# Altium PCB Regulator.PcbDoc
Units mil, origin at the board's own origin, x right, y up, seen from the top; angles counter-clockwise.
Board outline 2700 x 2100 mil, 2 copper layers (Top Layer, Bottom Layer), stack 62.8 mil thick; 15 components, 31 nets, 62 pads, 18 vias.
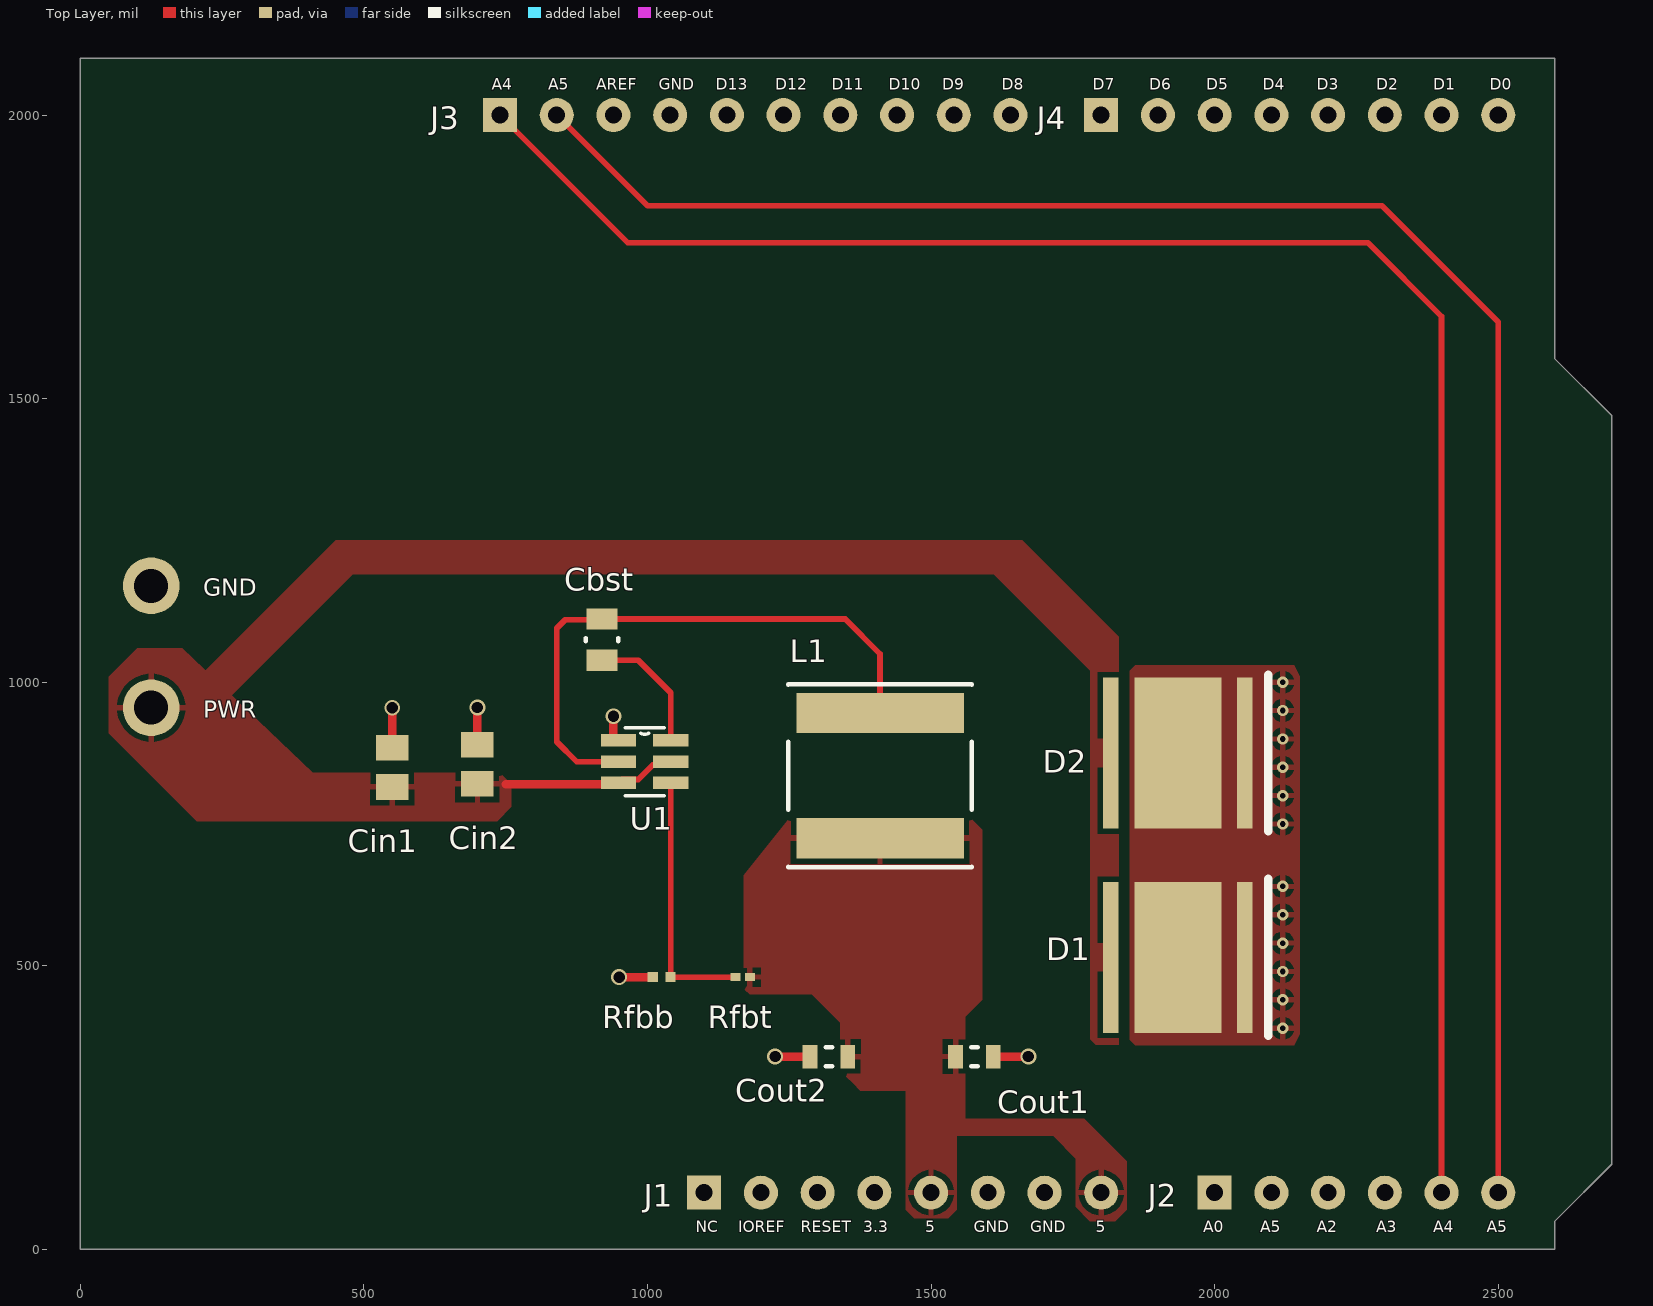
[diagram p0: Top Layer view]
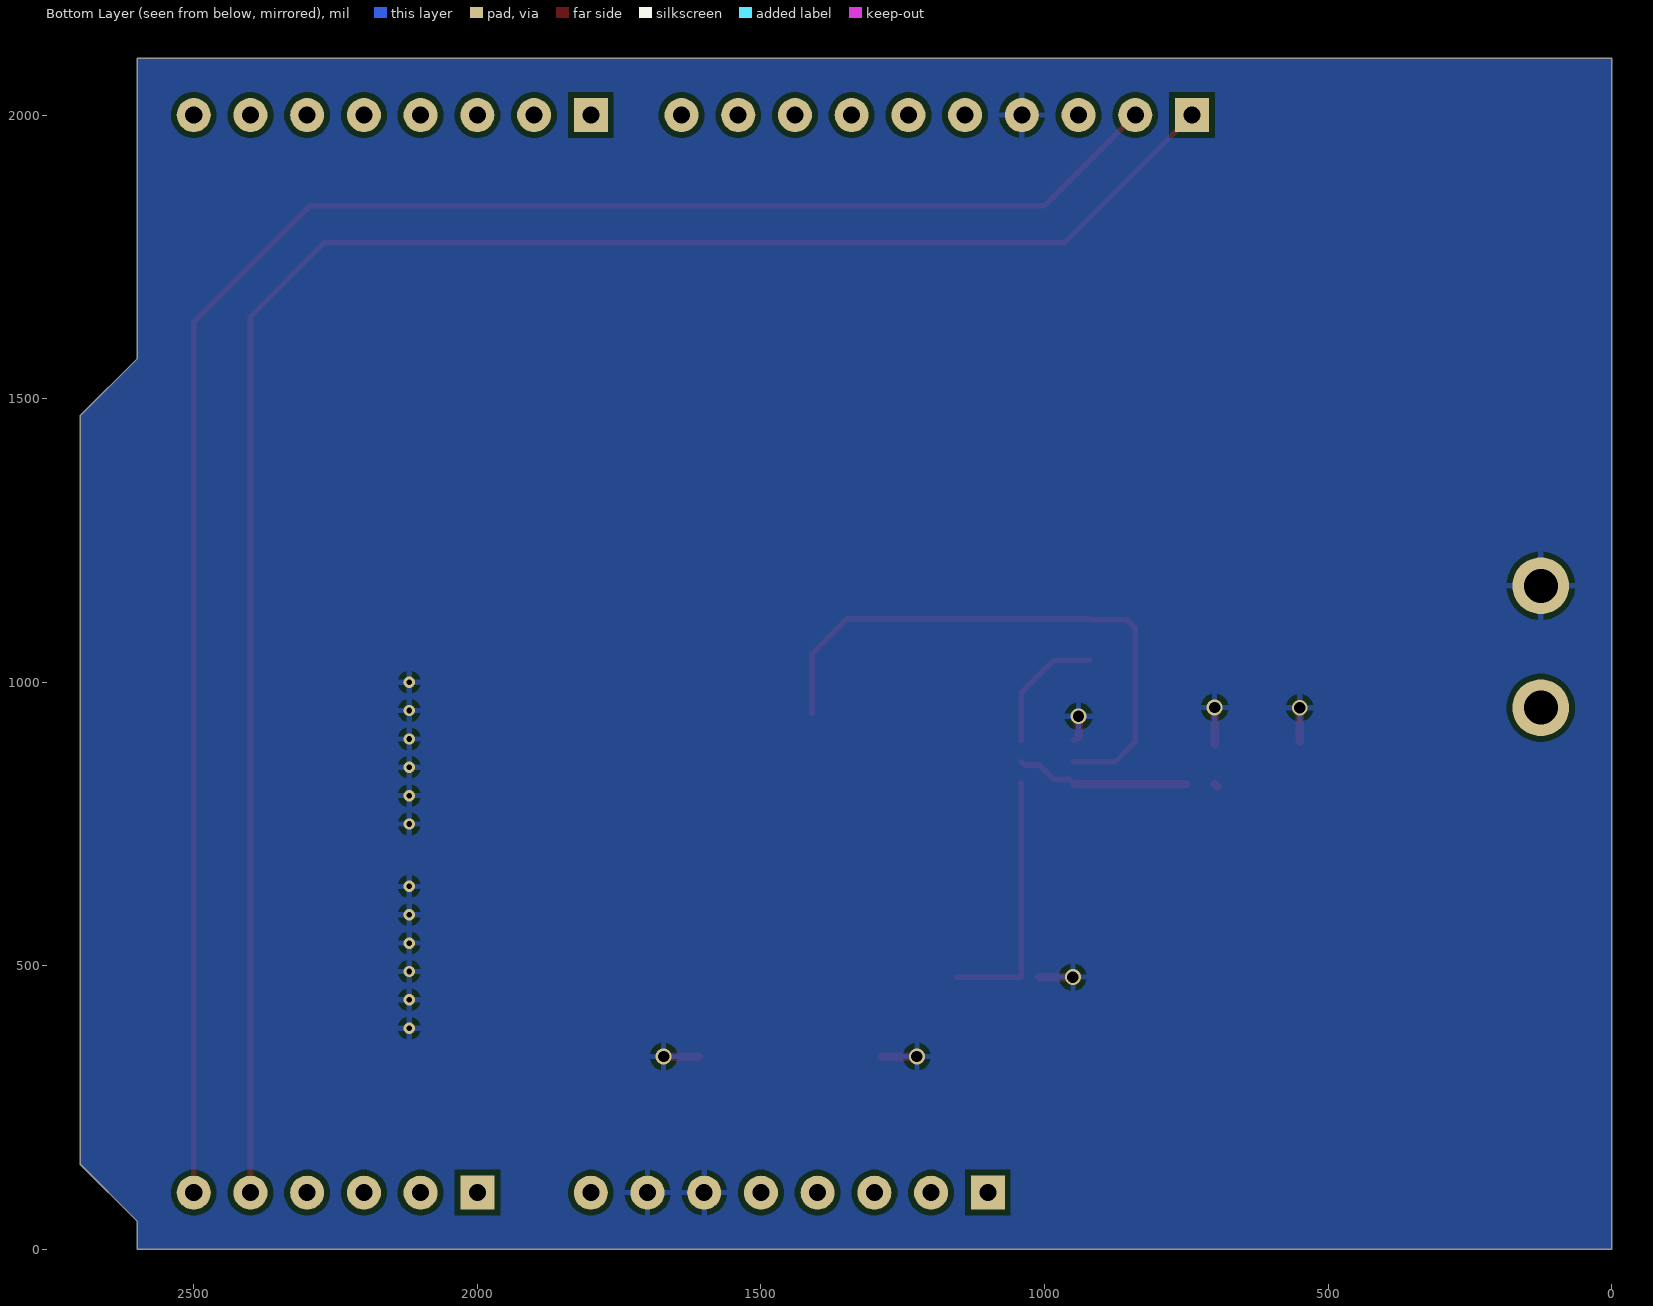
[diagram p1: Bottom Layer view, seen from below]

## Layer stack, top to bottom
Top Solder: solder mask 0.4, Solder Resist, Dk 3.5
Top Layer: signal copper 1.4
Dielectric 1: dielectric 60, FR-4, Dk 4.8
Bottom Layer: signal copper 1.4
Bottom Solder: solder mask 0.4, Solder Resist, Dk 3.5

## Board outline
0,0 0,2100 2600,2100 2600,1570 2700,1470 2700,150 2600,50 2600,0

## Design rules (kind name [scope] priority, off if disabled: settings)
Clearance [All] p1: gap=10 ignorepadtopadclearanceinfootprint=TRUE except(0: Arc-Hole Track-Hole SMDPad-Hole THPad-Hole Via-Hole Fill-Hole Poly-Hole Region-Hole Text-Hole)
MinimumSolderMaskSliver [All] p1: minsoldermaskwidth=5
PolygonConnect [All] p1: connectstyle=Relief reliefconductorwidth=10 reliefentries=4 polygonreliefangle="90 Angle" airgapwidth=10
RoutingVias [All] p1: holewidth=10 width=18 viastyle="Through Hole" minholewidth=6 minwidth=14 maxholewidth=28 maxwidth=50
SilkToSolderMaskClearance [IsPad] p1: minsilkscreentomaskgap=5 clearancetoexposedcopper=TRUE
SolderMaskExpansion [All] p1: expansion=0 istentingtop=FALSE
Width [All] p1: maxlimit=30 minlimit=5 preferedwidth=10
28 further rules are at their usual default settings.

## Components (designator, comment, footprint, x,y, rotation, side; value= is the part's Value field where it differs from the comment)
Cbst "CC0805KRX7R8BB104" FP-CC0805-0_85-MFG 920,1075 r90 top value="100 nF"
Cin1 "C2012X5R1V106K085AC" CAPC2012X100N 550,850 r90 top
Cin2 "C2012X5R1V106K085AC" CAPC2012X100N 700,855.35 r90 top
Cout1 "C1608X5R1A226M080AC" CAPC1608X100X20ML10 1576.54,340 r180 top
Cout2 "C1608X5R1A226M080AC" CAPC1608X100X20ML10 1320,340 r0 top
D1 "MKRAWT-00-0000-0D0HG235H" CREE-MK-R-2_V 1935,515 r0 top
D2 "MKRAWT-00-0000-0D0HG235H" CREE-MK-R-2_V 1935,875 r0 top
J1 "8-Pin-Header" 8-Pin-Header-Footprint-1 1100,100 r0 top
J2 "6-Pin-Header" 6-PINHEADER-Footprint-1 2000,100 r0 top
J3 "10-Pin-Header" 10-Pin-Header-Footprint-1 740,2000 r0 top
J4 "8-Pin-Header" 8-Pin-Header-Footprint-1 1800,2000 r0 top
L1 "NRS8030T3R3MJGJ" FP-NRS8030-MFG 1410,835.24 r270 top
Rfbb "ERJ2RKF1002X" RESC1005X40X25LL05T05 1025,480 r0 top
Rfbt "CRCW020156K2FNED" RESC0603X28X15NL05T05 1167.8,480 r0 top
U1 "TPS562200DDCR" DDC0006A 995,860 r0 top

## Footprints (in the part's own frame and the unit in brackets; to place one, negate y for a bottom-side part, rotate by r counter-clockwise, add the part's x,y. Pads: shape width x height; smd on the part's side, far side on the other; paste and mask are expansions set on the pad)
6-PINHEADER-Footprint-1 [mil]
  rect 60x60 hole 30: 1(0,0)
  round 60 hole 30: 2(100,0) 3(200,0) 4(300,0) 5(400,0) 6(500,0)
8-Pin-Header-Footprint-1 [mil]
  rect 60x60 hole 30: 1(0,0)
  round 60 hole 30: 2(100,0) 3(200,0) 4(300,0) 5(400,0) 6(500,0) 7(600,0) 8(700,0)
10-Pin-Header-Footprint-1 [mil]
  rect 60x60 hole 30: 1(0,0)
  round 60 hole 30: 2(100,0) 3(200,0) 4(300,0) 5(400,0) 6(500,0) 7(600,0) 8(700,0) 9(800,0) 10(900,0)
CAPC1608X100X20ML10 [mm] "Chip Capacitor, 2-Leads, Body 1.70x0.90mm, IPC Low Density"
  rect 0.65x1.05 smd: 1(-0.85,0) 2(0.85,0)
  silkscreen extent -0.15,-0.43 0.15,0.43, body extent -0.85,-0.45 0.85,0.45, height 1
CAPC2012X100N [mm]
  rect 1.15x1.47 smd: 1(-0.88,0) 2(0.88,0)
  body extent -1,-0.63 1,0.63, height 1
CREE-MK-R-2_V [mm] "SMD, 2-Leads, Body 7x7mm, Thermal Pad 3.9x6.76mm"
  rect 0.7x6.76 smd: 1(-3,0) 2(3,0)
  rect 3.9x6.76 smd: 3(0,0)
  silkscreen extent 4.05,-3.5 4.05,3.5, body extent -3.5,-3.5 3.5,3.5, height 4.1
DDC0006A [mil]
  rect 62x22 smd paste-4 mask+2: 1(-46,37.4) 2(-46,0) 3(-46,-37.4) 4(46,-37.4) 5(46,0) 6(46,37.4)
  silkscreen extent -34,-60 34,60
FP-CC0805-0_85-MFG [mm]
  rect 0.95x1.4 smd paste+0 mask+0: 1(-0.925,0) 2(0.925,0)
  silkscreen extent -0.08,-0.72 0.08,0.72, body extent -1.6,-1.05 1.6,1.05, height 0.25
FP-NRS8030-MFG [mm]
  rect 1.8x7.5 smd paste+0 mask+0: 1(-2.8,0) 2(2.8,0)
  silkscreen extent -4.1,-4.1 4.1,4.1, body extent -4.2,-4.2 4.2,4.2, height 0.25
RESC0603X28X15NL05T05 [mm] "Chip Resistor, 2-Leads, Body 0.60x0.30mm, IPC Medium Density"
  rect 0.45x0.35 smd: 1(-0.325,0) 2(0.325,0)
  body extent -0.33,-0.17 0.33,0.18, height 0.28
RESC1005X40X25LL05T05 [mm] "Chip Resistor, 2-Leads, Body 1.05x0.55mm, IPC High Density"
  rect 0.45x0.45 smd: 1(-0.4,0) 2(0.4,0)
  body extent -0.53,-0.28 0.53,0.28, height 0.4

## Part data
Cbst: library part CMP-1036-04410-2, "CAP CER 0.1UF 25V X7R 0805", Capacitance="100 nF", Manufacturer=Yageo, Package=CC0805-0.85, Temperature="-30°C to +85°C", Temperature Characteristic=X7R, Temperature Range High=+85°C, Temperature Range Low=-30°C, Tolerance=0.1, Voltage Rating="25 V", Automotive=No, Category=Cap, ComponentLink2Description=Datasheet, ComponentLink2URL=http://www.yageo.com/documents/recent/UPY-GPHC_Y5V_6.3V-to-50V_8.pdf, Device Class L1="Passive Components", Device Class L2=Capacitors, Device Class L3="Ceramic Capacitors", Digikey Description="CAP CER 0.1UF 25V X7R 0805", Footprint Url=http://www.yageo.com/exep/pages/download/literatures/UPY-C_GEN_24.pdf, Height=0.95mm, Ipc Land Pattern Name=CAPC200125X85, Lead Free=Yes, Manufacturer Part Number=CC0805KRX7R8BB104, Material=Ceramic, Mouser Description="Multilayer Ceramic Capacitors MLCC - SMD/SMT 100nF 25V X7R 10%", Octopart=https://octopart.com/cc0805krx7r8bb104-yageo-39467766, RoHS=TRUE
Cin1 Cin2: "10ÂµF Â±10% 35V Ceramic Capacitor X5R 0805 (2012 Metric)", Package="2012 TDK", Check_prices=https://www.snapeda.com/parts/C2012X5R1V106K085AC/TDK-Lambda+Americas+Inc/view-part/?ref=eda, MF=TDK, MP=C2012X5R1V106K085AC, Purchase-URL=https://pricing.snapeda.com/search/part/C2012X5R1V106K085AC/?ref=eda, SnapEDA_Link=https://www.snapeda.com/parts/C2012X5R1V106K085AC/TDK-Lambda+Americas+Inc/view-part/?ref=snap
Cout1 Cout2: library part CMP-2000-05441-1, "Chip Capacitor, 22 uF, +/- 20%, 10 V, -55 to 85 degC, 0603 (1608 Metric), RoHS, Tape and Reel", Capacitance=22µF, Manufacturer=TDK, Operating Temperature=-55degC~85degC, Package / Case=0603(1608Metric), Package Description="2-Pin Surface Mount Device, Body 1.6 x 0.8 mm", Package Reference=603, PCN Part Number=MLCCPartNumberChange30/Nov/2012, Ratings=-, Standard Package=1, Temperature Coefficient=X5R, Tolerance=±20%, Voltage - Rated=10V, Applications=GeneralPurpose, Category=Capacitors, Datasheet URL=http://download.siliconexpert.com/pdfs/2015/4/21/15/54/45/779/tdk_/manual/37024850441143360mlcc_commercial_general_en.pdf, Datasheet Version=Mar-15, Design Resources=20WNon-IsolatedBuckLEDDriverUsingPLLNK460KG, Family=CeramicCapacitors, Features=-, Height - Seated (Max)=-, Kits=445-9014-KIT-ND-KITMLCC100PF-22UF060310-50V, Lead Spacing=-, Lead Style=-, Manufacturer URL=http://www.tdk.com/, Mounting Type=SurfaceMount,MLCC, Online Catalog=CSeries,GeneralPurpose, Other Names=445-9077-1, Packaging=CutTape(CT), Product Training Modules=CSeriesGeneralApplicationsSEAT,CCV,andTVCLDesignToolsGuidetoReplacinganElectrolyticCapacitorwithanMLCC, RoHS Information=RoHSCertificate-MLCC, Series=C, Size / Dimension="0.063\"Lx0.031\"W(1.60mmx0.80mm)", Thickness (Max)="0.035\"(0.90mm)"
D1 D2: library part CMP-2100-00977-1, "LED, White, 12 V, 2-Pin SMD, RoHS, Tape and Reel"
J1 J4: library part CMP-002-00072-1, "simple 8 pin header", Pins=8
J2: library part CMP-002-00071-1, "Simple 6 pin header", Pins=6
J3: library part CMP-002-00073-1, "Simple 10 pin header", Pins=10
L1: library part CMP-14484-000405-1, "Inductor Power Shielded Wirewound 3.3uH 20% 100KHz Ferrite 4.2A 24.7mΩ DCR T/R", Case/Package=Nonstandard, Current Rating=4.3A, DC Resistance (DCR)=19mR, Inductance=3.3uH, Inductance Tolerance=20%, Max DC Current=4.2A, Max Operating Temperature=125°C, Min Operating Temperature=-25°C, Package Quantity=1000, Resistor Type=Wirewound, Self Resonant Frequency=50MHz, Test Frequency=100kHz, Core Material=Ferrite, Depth=8.2mm, Halogen Free="Halogen Free", Height=3mm, Height - Seated (Max)=0.118inch, Lead Free="Lead Free", Lead Pitch=5.6mm, Length=8mm, Mount="Surface Mount", Number of Pins=2, Packaging="Tape and Reel", Radiation Hardening=No, REACH SVHC="No SVHC", RMS Current (Irms)=4.3A, RoHS Compliant=Yes, Saturation Current=4.2A, Series=NRS, Shielding=Shielded, Termination=SMD/SMT, Tolerance=20%, Width=0.315inch
Rfbb: library part CMP-2000-07588-1, "Chip Resistor, 10 KOhm, +/- 1%, 0.1 W, -55 to 155 degC, 0402 (1005 Metric), RoHS, Tape and Reel", Case Code (Imperial)=0402, Case Code (Metric)=1005, Manufacturer=Panasonic, Max Operating Temperature=155degC, Max Power Dissipation=100mW, Min Operating Temperature=-55degC, Package Description="2-Pin Surface Mount Device, Body 1 x 0.5 mm", Package Quantity=1, Package Reference=402, Resistance=10KOhm, Temperature Coefficient=100ppm\/degreesC, Tolerance=1%, Voltage Rating=50V, Case\/Package=0402, Composition=ThickFilm, Contact Plating=Tin, Datasheet URL=https://industrial.panasonic.com/cdbs/www-data/pdf/RDA0000/AOA0000C304.pdf, Datasheet Version=02/2017, Depth=0.5mm, Height=0.35mm, Lead Free=LeadFree, Length=1mm, Manufacturer URL=http://www.panasonic.com/, Military Standard=Not, Mount=SurfaceMount, Mounting Technology=SurfaceMount, Number of Pins=2, Number of Terminations=2, Packaging=TapeandReel, Power Rating=100mW, Radiation Hardening=No, REACH SVHC=NoSVHC, RoHSCompliant=True, Termination=SMD/SMT, Voltage Rating (DC)=50V, Width=0.02inch
Rfbt: library part CMP-2004-00723-1, Manufacturer="Vishay Dale", Part Number=CRCW020156K2FNED
U1: "No Description Available", Alternate_Manufacturer=None, CurrentDate="Not shown in title block", Manufacturer="Texas Instruments", PartNumber=TPS562200DDC, Address1="Not shown in title block", Address2="Not shown in title block", Address3="Not shown in title block", Address4="Not shown in title block", ApprovedBy="Not shown in title block", Author="Not shown in title block", CheckedBy="Not shown in title block", CompanyName="Not shown in title block", ComponentLink1Description="Datasheet Link", ComponentLink1URL=https://sps06.itg.ti.com/sites/KMS/crossdivteams/altium/docs/ComponentDatasheets/TPS562200_DS_v08_13_0909.docx, CompType=IC, Copyright="Copyright (C) 2023 Ultra Librarian. All rights reserved.", CurrentTime="Not shown in title block", Date="Not shown in title block", DocumentFullPathAndName="Not shown in title block", DocumentName="Not shown in title block", DocumentNumber=1, Engineer="Not shown in title block", ImagePath="Not shown in title block", LatestRevisionDate=2014-02-20, Manufacturer_Part_Number=TPS562200DDCR, Mfr_Name="Texas Instruments", ModifiedDate="Not shown in title block", MountType=SMT, Organization="Not shown in title block", PackageReference=DDC0006A, Publisher="Texas Instruments", RefDes=RefDes, Revision="Use project parameter SCH_Rev", RoHS=Y, SheetNumber=1, SheetTotal=1, SymbolCreator=a0411947, SymbolVersion=2013-09-26, Time="Not shown in title block", Type=DEV, U/M=EA

## Free pads (board coordinates)
  round 100 hole 60: 19(125,955) 19(125,1170)

## Via types
v1: diameter 20, hole 10, Top Layer to Bottom Layer, 12 vias
v2: diameter 28, hole 20, Top Layer to Bottom Layer, 6 vias

## Nets (pads, with @x,y where several pads share a name; then routed paths per layer and width w, separated by ;. In a path a pad name is that pad's centre, name@x,y a point inside that pad or via, vN(x,y) a via of type N, cw(c..) or ccw(c..) an arc to the next point about the centre after c; other vN are vias at no path point)
3.3V: J1.4
+5: Cout1.2 Cout2.2 J1.5 J1.8 L1.2 Rfbt.2
A0: J2.1
A1: J2.2
A2: J2.3
A3: J2.4
A4: J2.5 J3.1 | length 3352
  Top Layer w10: J3.1 965,1775 2270,1775 2400,1645 J2.5
A5: J2.6 J3.2 | length 3346.2
  Top Layer w10: J3.2 1000,1840 2295,1840 2500,1635 J2.6
AREF: J3.3
D0: J4.8
D1: J4.7
D2: J4.6
D3: J4.5
D4: J4.4
D5: J4.3
D6: J4.2
D7: J4.1
D8: J3.10
D9: J3.9
D10: J3.8
D11: J3.7
D12: J3.6
D13: J3.5
GND: Cin1.2 Cin2.2 Cout1.1 Cout2.1 D1.2 D1.3 D2.2 D2.3 J1.6 J1.7 J3.4 pad.19@125,1170 Rfbb.1 U1.1 | length 356.1
  Top Layer w10: U1.1@940,903.4 946,897.4 U1.1
  Top Layer w15: Cin1.2@550,894.65 v2(550,955) ; Cin2.2 v2(700,955.35) ; U1.1@940,903.4 v2(940,940) ; v2(950,480) Rfbb.1 ; v2(1225,340) Cout2.1 ; Cout1.1 v2(1671.54,340)
  other v1: 2120,390 2120,440 2120,490 2120,540 2120,590 2120,640 2120,750 2120,800 2120,850 2120,900 2120,950 2120,1000
IOREF: J1.2
NC: J1.1
RESET: J1.3
SW: Cbst.2 L1.1 U1.2 | length 1030.3
  Top Layer w10: U1.2 875,860 840,895 840,1095 855,1110 918.58,1110 Cbst.2 1348.58,1111.42 1410,1050 L1.1
VBST: Cbst.1 U1.6 | length 228.6
  Top Layer w10: Cbst.1 983.72,1038.58 1041,981.31 U1.6
VFB: Rfbb.2 Rfbt.1 U1.4 | length 457
  Top Layer w10: U1.4 1041,480.25 Rfbb.2 Rfbt.1
VIN: Cin1.1 Cin2.1 D1.1 D2.1 pad.19@125,955 U1.3 U1.5 | length 315.1
  Top Layer w10: U1.3@946.4,820 U1.3 955,828.6 983.79,828.6 1009.19,854 1035,854 U1.5
  Top Layer w15: Cin2.1@694.65,815.35 Cin2.1 ; 750,820 U1.3@946.4,820

## Polygon pours and split planes (outlines as drawn)
+5 on Top Layer "+5_L01_P015" (solid, pour order 15): 1545,215.62 1559.38,230 1770,230 1845,155 1845,70 1825,50 1780,50 1755,75 1755,160 1715,200 1545,200
+5 on Top Layer "+5_L01_P014" (solid, pour order 14): 1560,280.62 1560,230.62 1545,215.62 1545,70 1530,55 1470,55 1455,70 1455,280.62
+5 on Top Layer "+5_L01_P010" (solid, pour order 10): 1250,760 1570,760 1590,740 1590,440 1560,410 1560,280 1375,280 1362.5,292.5 1340,315 1340,400 1290,450 1180,450 1170,460 1170,660
VIN on Top Layer "VIN_L01_P008" (solid, pour order 8): 410,840 740,840 760,820 760,780 735,755 205,755 50,910 50,1010 100,1060 180,1060
VIN on Top Layer "VIN_L01_P009" (solid, pour order 9): 1780.5,1020.5 1780.5,370.5 1790.5,360.5 1830.5,360.5 1830.5,1080.5 1660.5,1250.5 450.5,1250.5 218.51,1018.51 264.51,974.51 480.5,1190.5 1610.5,1190.5 1660.5,1140.5
GND on Top Layer "GND_L01_P003" (solid, pour order 3): 1850,1020 1850,370 1860,360 2140,360 2150,380 2150,1010 2140,1030 1860,1030
GND on Bottom Layer "GND_L02_P000" (solid, pour order 0): 2600,0 2600,50 2700,150 2700,1470 2600,1570 2600,2100 0,2100 0,0

## Silkscreen, mask and mechanical layers (free items; w line width, h text height)
Top Overlay:
  text "A4" at 725,2045 h20
  text "A5" at 825,2045 h20
  text "AREF" at 910,2045 h20
  text "GND" at 1020,2045 h20
  text "D13" at 1120,2045 h20
  text "D12" at 1225,2045 h20
  text "D11" at 1325,2045 h20
  text "D10" at 1425,2045 h20
  text "D9" at 1520,2045 h20
  text "D8" at 1625,2045 h20
  text "D7" at 1785,2045 h20
  text "D6" at 1885,2045 h20
  text "D5" at 1985,2045 h20
  text "D4" at 2085,2045 h20
  text "D3" at 2180,2045 h20
  text "D2" at 2285,2045 h20
  text "D1" at 2385,2045 h20
  text "D0" at 2485,2045 h20
  text "GND" at 217,1152 h30
  text "PWR" at 217,937 h30
  text "NC" at 1085,30 h20
  text "IOREF" at 1160,30 h20
  text "RESET" at 1270,30 h20
  text "3.3" at 1380,30 h20
  text "5" at 1490,30 h20
  text "GND" at 1575,30 h20
  text "GND" at 1675,30 h20
  text "5" at 1790,30 h20
  text "A0" at 1980,30 h20
  text "A5" at 2080,30 h20
  text "A2" at 2180,30 h20
  text "A3" at 2285,30 h20
  text "A4" at 2385,30 h20
  text "A5" at 2480,30 h20